# Altium PCB PCB_JD.PcbDoc
Units mil, origin at the board's own origin, x right, y up, seen from the top; angles counter-clockwise.
Board outline 1494.13 x 2047.24 mil, 2 copper layers (Top Layer, Bottom Layer); 26 components, 24 nets, 111 pads, 35 vias.
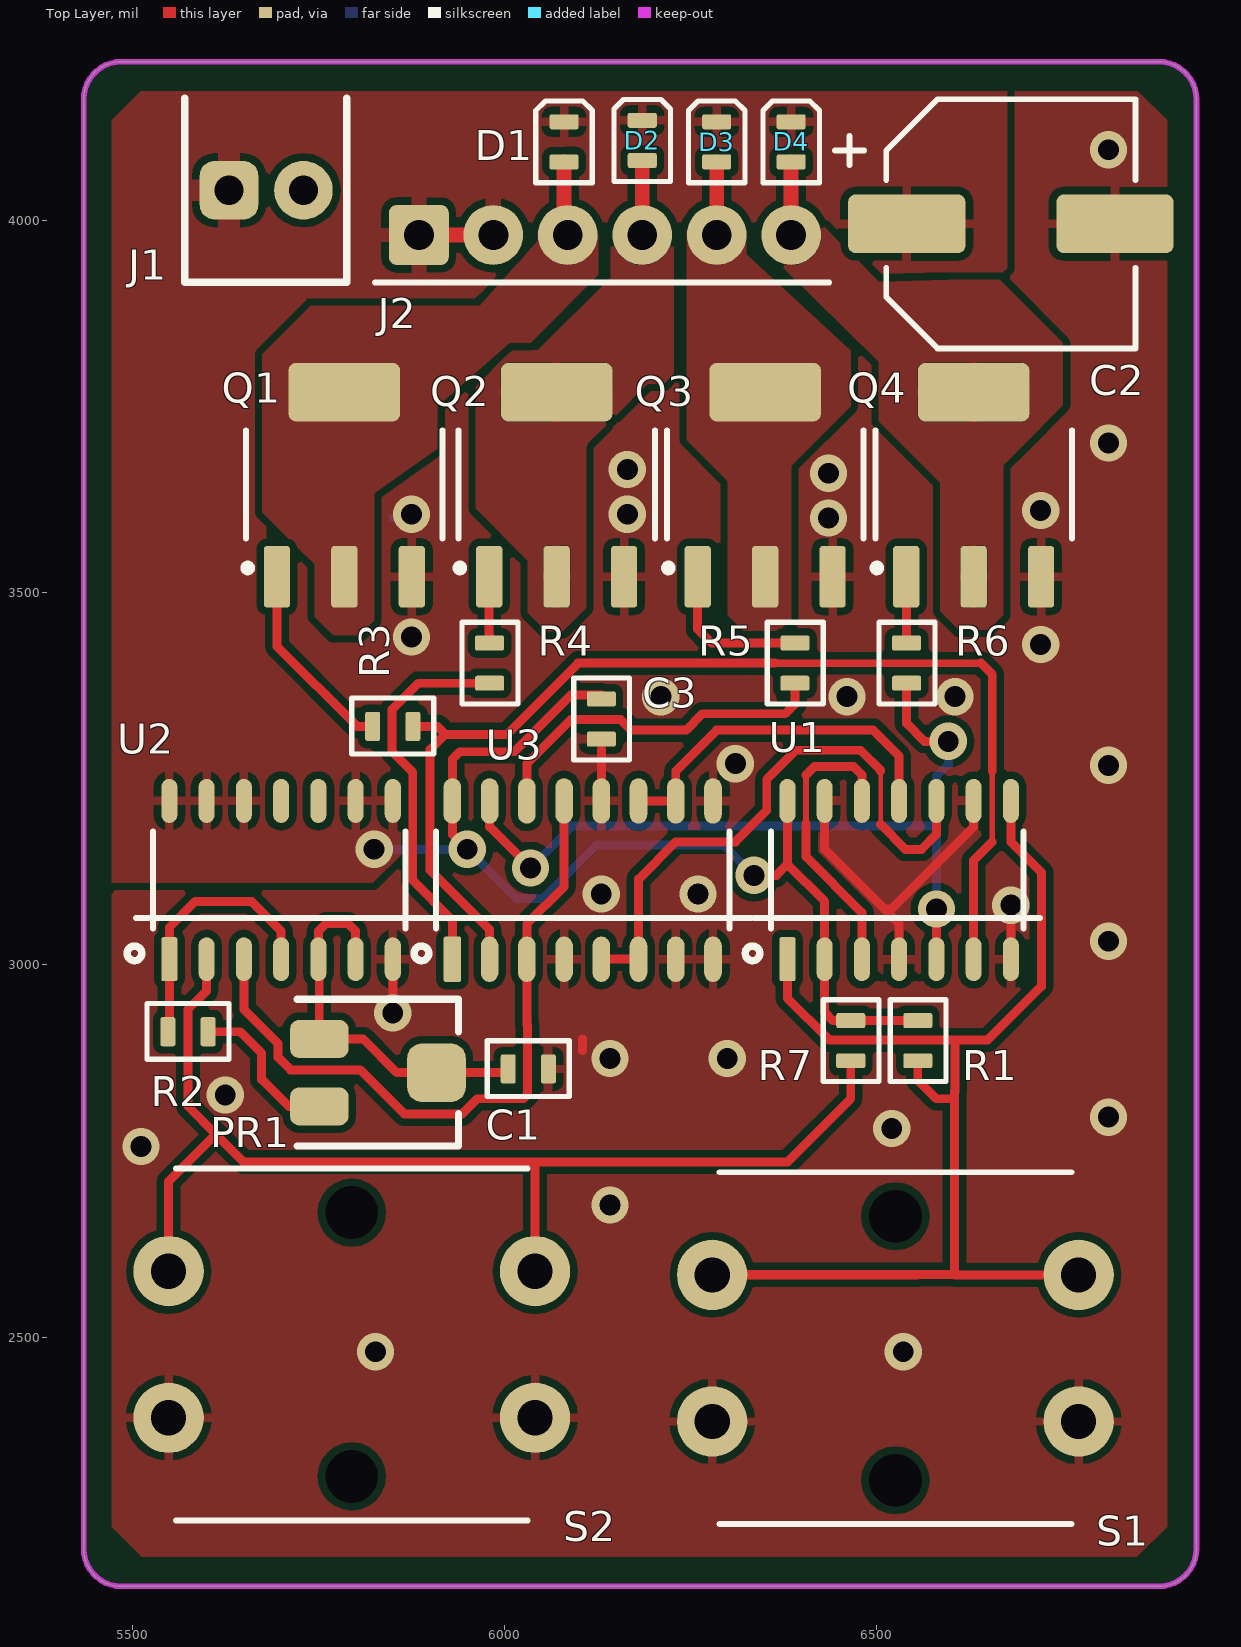
[diagram p0: Top Layer view]
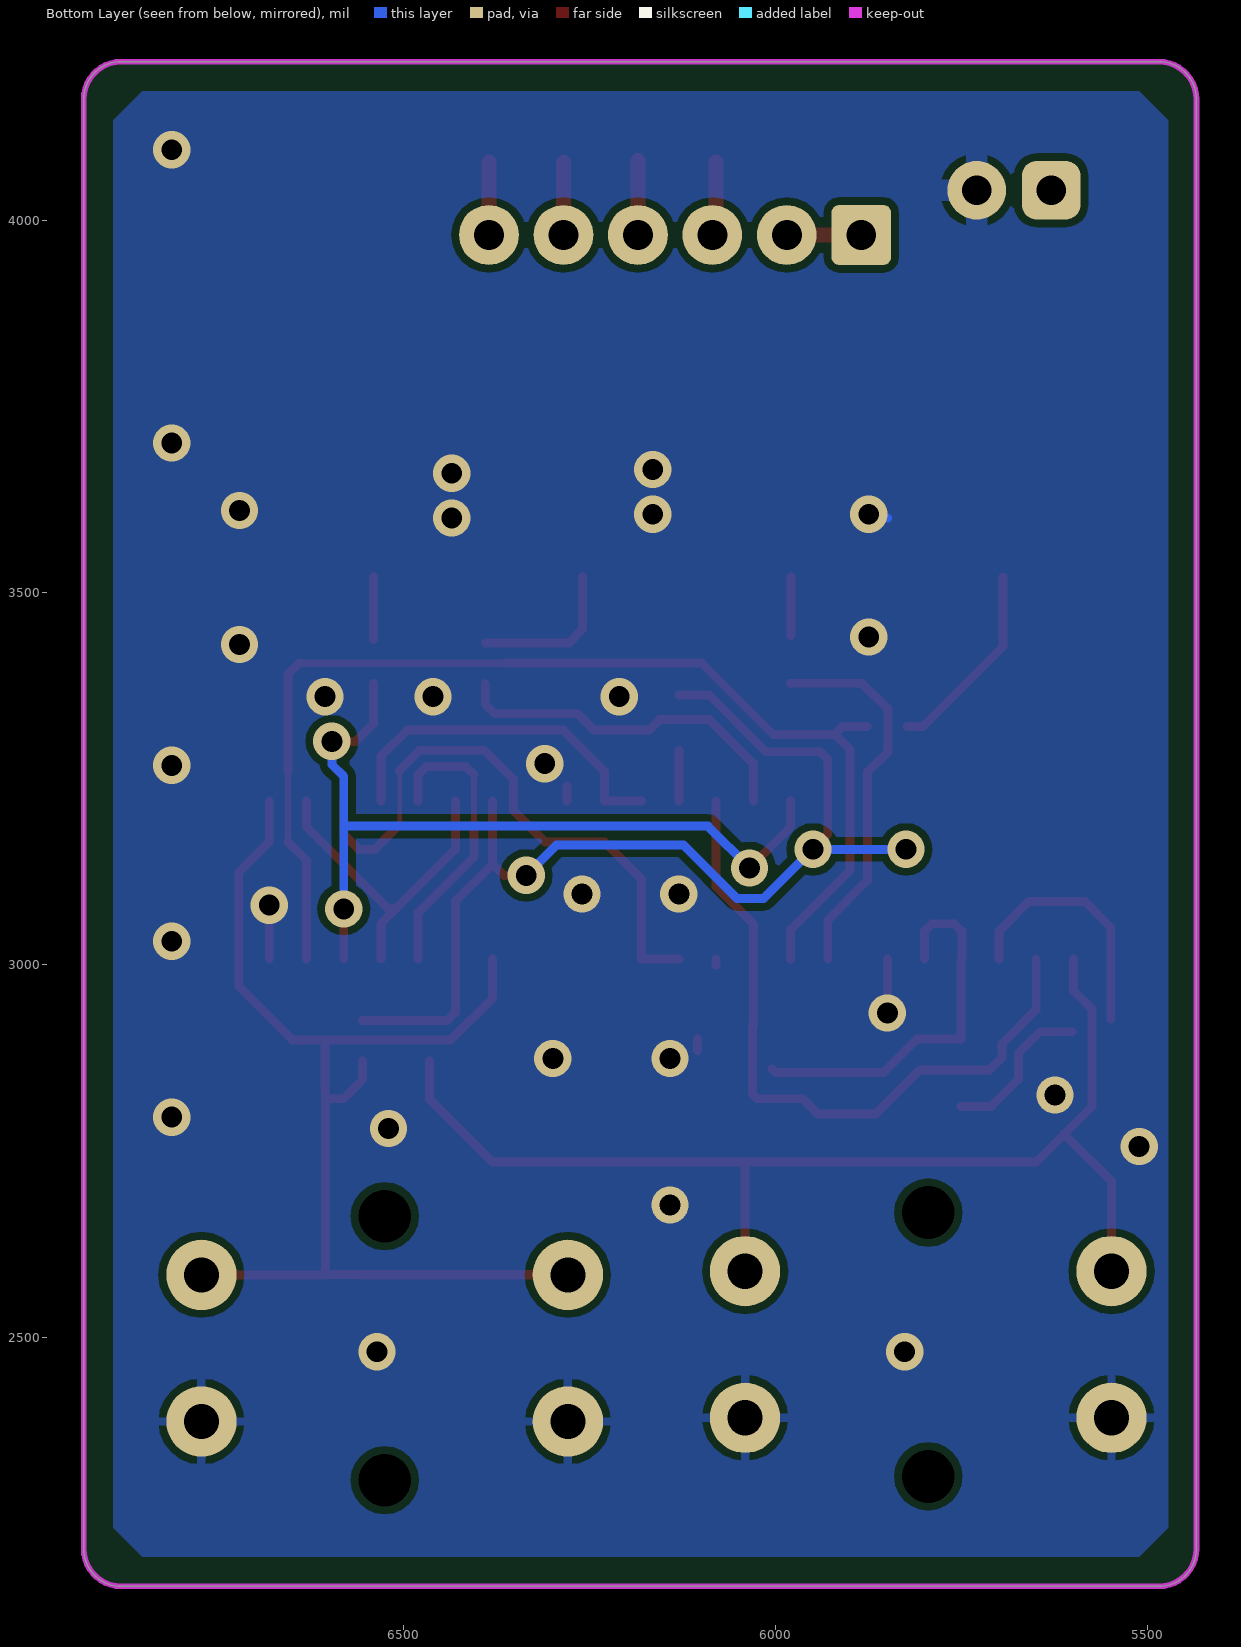
[diagram p1: Bottom Layer view, seen from below]

## Layer stack, top to bottom
Top Solder: solder mask 0.4, Solder Resist, Dk 3.5
Top Layer: signal copper 1.4
Dielectric 1: dielectric 12.6, FR-4, Dk 4.8
Bottom Layer: signal copper 1.4
Bottom Solder: solder mask 0.4, Solder Resist, Dk 3.5

## Board outline
5435,2215.35 ccw(c5485,2215.35) 5485,2165.35 6879.13,2165.35 ccw(c6879.13,2215.35) 6929.13,2215.35 6929.13,4162.6 ccw(c6879.13,4162.6) 6879.13,4212.6 5485,4212.6 ccw(c5485,4162.6) 5435,4162.6

## Design rules (kind name [scope] priority, off if disabled: settings)
Clearance [All] p1: gap=10 ignorepadtopadclearanceinfootprint=FALSE except(0: Arc-Hole Track-Hole SMDPad-Hole THPad-Hole Via-Hole Fill-Hole Poly-Hole Region-Hole Text-Hole)
PlaneConnect [All] p1: pad.planeconnectstyle=Relief pad.reliefexpansion=20 pad.reliefentries=4 pad.reliefconductorwidth=12 pad.reliefairgap=20 via.planeconnectstyle=Direct via.reliefexpansion=20 via.reliefentries=4 via.reliefconductorwidth=12 via.reliefairgap=10
PolygonConnect PolygonConnect_38 [All vs IsNamedPolygon('GND_L01_P029')] p1: thpad.connectstyle=Relief thpad.reliefconductorwidth=12 thpad.reliefentries=4 thpad.polygonreliefangle="90 Angle" thpad.airgapwidth=10 smdpad.connectstyle=Relief smdpad.reliefconductorwidth=12 smdpad.reliefentries=4 smdpad.polygonreliefangle="90 Angle" smdpad.airgapwidth=10 via.connectstyle=Direct via.reliefconductorwidth=10 via.reliefentries=4 via.polygonreliefangle="90 Angle" via.airgapwidth=10
PolygonConnect PolygonConnect_37 [All vs IsNamedPolygon('NETU1_4_L01_P025')] p2: thpad.connectstyle=Relief thpad.reliefconductorwidth=10 thpad.reliefentries=4 thpad.polygonreliefangle="90 Angle" thpad.airgapwidth=10 smdpad.connectstyle=Relief smdpad.reliefconductorwidth=12 smdpad.reliefentries=4 smdpad.polygonreliefangle="90 Angle" smdpad.airgapwidth=10 via.connectstyle=Relief via.reliefconductorwidth=10 via.reliefentries=4 via.polygonreliefangle="90 Angle" via.airgapwidth=10
PolygonConnect PolygonConnect_36 [All vs IsNamedPolygon('GND_L01_P027')] p3: thpad.connectstyle=Relief thpad.reliefconductorwidth=12 thpad.reliefentries=4 thpad.polygonreliefangle="90 Angle" thpad.airgapwidth=10 smdpad.connectstyle=Relief smdpad.reliefconductorwidth=12 smdpad.reliefentries=4 smdpad.polygonreliefangle="90 Angle" smdpad.airgapwidth=10 via.connectstyle=Direct via.reliefconductorwidth=10 via.reliefentries=4 via.polygonreliefangle="90 Angle" via.airgapwidth=10
PolygonConnect PolygonConnect_35 [All vs IsNamedPolygon('VCC_L01_P024')] p4: thpad.connectstyle=Relief thpad.reliefconductorwidth=20 thpad.reliefentries=4 thpad.polygonreliefangle="90 Angle" thpad.airgapwidth=10 smdpad.connectstyle=Relief smdpad.reliefconductorwidth=12 smdpad.reliefentries=4 smdpad.polygonreliefangle="90 Angle" smdpad.airgapwidth=10 via.connectstyle=Direct via.reliefconductorwidth=10 via.reliefentries=4 via.polygonreliefangle="90 Angle" via.airgapwidth=10
PolygonConnect PolygonConnect_34 [All vs IsNamedPolygon('GND_L01_P027')] p5: thpad.connectstyle=Relief thpad.reliefconductorwidth=12 thpad.reliefentries=4 thpad.polygonreliefangle="90 Angle" thpad.airgapwidth=10 smdpad.connectstyle=Relief smdpad.reliefconductorwidth=12 smdpad.reliefentries=4 smdpad.polygonreliefangle="90 Angle" smdpad.airgapwidth=10 via.connectstyle=Direct via.reliefconductorwidth=10 via.reliefentries=4 via.polygonreliefangle="90 Angle" via.airgapwidth=10
PolygonConnect PolygonConnect_33 [HasFootprint('ARK_DG308-2.54X2_JD') vs IsNamedPolygon('VCC_L01_P023')] p6: thpad.connectstyle=Relief thpad.reliefconductorwidth=30 thpad.reliefentries=4 thpad.polygonreliefangle="90 Angle" thpad.airgapwidth=10 smdpad.connectstyle=Relief smdpad.reliefconductorwidth=10 smdpad.reliefentries=4 smdpad.polygonreliefangle="90 Angle" smdpad.airgapwidth=10 via.connectstyle=Relief via.reliefconductorwidth=10 via.reliefentries=4 via.polygonreliefangle="90 Angle" via.airgapwidth=10
PolygonConnect PolygonConnect_32 [HasFootprint('SOT223_JD') vs IsNamedPolygon('GND_L02_P027')] p7: thpad.connectstyle=Relief thpad.reliefconductorwidth=10 thpad.reliefentries=4 thpad.polygonreliefangle="90 Angle" thpad.airgapwidth=10 smdpad.connectstyle=Relief smdpad.reliefconductorwidth=20 smdpad.reliefentries=4 smdpad.polygonreliefangle="90 Angle" smdpad.airgapwidth=10 via.connectstyle=Relief via.reliefconductorwidth=10 via.reliefentries=4 via.polygonreliefangle="90 Angle" via.airgapwidth=10
PolygonConnect PolygonConnect_31 [HasFootprint('ARK_DG308-2.54X2_JD') vs IsNamedPolygon('GND_L02_P027')] p8: thpad.connectstyle=Relief thpad.reliefconductorwidth=30 thpad.reliefentries=4 thpad.polygonreliefangle="90 Angle" thpad.airgapwidth=10 smdpad.connectstyle=Relief smdpad.reliefconductorwidth=10 smdpad.reliefentries=4 smdpad.polygonreliefangle="90 Angle" smdpad.airgapwidth=10 via.connectstyle=Relief via.reliefconductorwidth=10 via.reliefentries=4 via.polygonreliefangle="90 Angle" via.airgapwidth=10
PolygonConnect PolygonConnect_30 [All vs IsNamedPolygon('GND_L02_P027')] p9: thpad.connectstyle=Relief thpad.reliefconductorwidth=12 thpad.reliefentries=4 thpad.polygonreliefangle="90 Angle" thpad.airgapwidth=10 smdpad.connectstyle=Relief smdpad.reliefconductorwidth=12 smdpad.reliefentries=4 smdpad.polygonreliefangle="90 Angle" smdpad.airgapwidth=10 via.connectstyle=Direct via.reliefconductorwidth=10 via.reliefentries=4 via.polygonreliefangle="90 Angle" via.airgapwidth=10
PolygonConnect PolygonConnect_29 [All vs IsNamedPolygon('VCC_L01_P023')] p10: thpad.connectstyle=Relief thpad.reliefconductorwidth=20 thpad.reliefentries=4 thpad.polygonreliefangle="90 Angle" thpad.airgapwidth=10 smdpad.connectstyle=Relief smdpad.reliefconductorwidth=12 smdpad.reliefentries=4 smdpad.polygonreliefangle="90 Angle" smdpad.airgapwidth=10 via.connectstyle=Direct via.reliefconductorwidth=10 via.reliefentries=4 via.polygonreliefangle="90 Angle" via.airgapwidth=10
PolygonConnect PolygonConnect_28 [All vs IsNamedPolygon('GND_L02_P027')] p11: thpad.connectstyle=Relief thpad.reliefconductorwidth=12 thpad.reliefentries=4 thpad.polygonreliefangle="90 Angle" thpad.airgapwidth=10 smdpad.connectstyle=Relief smdpad.reliefconductorwidth=12 smdpad.reliefentries=4 smdpad.polygonreliefangle="90 Angle" smdpad.airgapwidth=10 via.connectstyle=Direct via.reliefconductorwidth=10 via.reliefentries=4 via.polygonreliefangle="90 Angle" via.airgapwidth=10
PolygonConnect PolygonConnect_27 [All vs IsNamedPolygon('GND_L01_P022')] p12: thpad.connectstyle=Relief thpad.reliefconductorwidth=10 thpad.reliefentries=4 thpad.polygonreliefangle="90 Angle" thpad.airgapwidth=10 smdpad.connectstyle=Relief smdpad.reliefconductorwidth=12 smdpad.reliefentries=4 smdpad.polygonreliefangle="90 Angle" smdpad.airgapwidth=10 via.connectstyle=Direct via.reliefconductorwidth=10 via.reliefentries=4 via.polygonreliefangle="90 Angle" via.airgapwidth=10
PolygonConnect PolygonConnect_26 [All vs IsNamedPolygon('GND_L01_P006') Or  IsNamedPolygon('GND_L01_P008')] p13: thpad.connectstyle=Relief thpad.reliefconductorwidth=10 thpad.reliefentries=4 thpad.polygonreliefangle="90 Angle" thpad.airgapwidth=10 smdpad.connectstyle=Relief smdpad.reliefconductorwidth=12 smdpad.reliefentries=4 smdpad.polygonreliefangle="90 Angle" smdpad.airgapwidth=10 via.connectstyle=Direct via.reliefconductorwidth=10 via.reliefentries=4 via.polygonreliefangle="90 Angle" via.airgapwidth=10
PolygonConnect PolygonConnect_25 [All vs IsNamedPolygon('NETD4_A_L01_P016') Or  IsNamedPolygon('NETD2_A_L01_P018')] p14: connectstyle=Direct reliefconductorwidth=10 reliefentries=4 polygonreliefangle="90 Angle" airgapwidth=10
PolygonConnect PolygonConnect_24 [All vs IsNamedPolygon('NETD1_A_L01_P004')] p15: connectstyle=Direct reliefconductorwidth=10 reliefentries=4 polygonreliefangle="90 Angle" airgapwidth=10
PolygonConnect PolygonConnect_23 [All vs IsNamedPolygon('NETD3_A_L01_P002')] p16: connectstyle=Direct reliefconductorwidth=10 reliefentries=4 polygonreliefangle="90 Angle" airgapwidth=10
PolygonConnect PolygonConnect_22 [All vs IsNamedPolygon('VCC_L01_P022')] p17: thpad.connectstyle=Relief thpad.reliefconductorwidth=20 thpad.reliefentries=4 thpad.polygonreliefangle="90 Angle" thpad.airgapwidth=10 smdpad.connectstyle=Relief smdpad.reliefconductorwidth=12 smdpad.reliefentries=4 smdpad.polygonreliefangle="90 Angle" smdpad.airgapwidth=10 via.connectstyle=Direct via.reliefconductorwidth=10 via.reliefentries=4 via.polygonreliefangle="90 Angle" via.airgapwidth=10
PolygonConnect PolygonConnect_21 [All vs IsNamedPolygon('NETD1_A_L01_P004') Or  IsNamedPolygon('NETD3_A_L01_P002')] p18: thpad.connectstyle=Relief thpad.reliefconductorwidth=70 thpad.reliefentries=4 thpad.polygonreliefangle="90 Angle" thpad.airgapwidth=10 smdpad.connectstyle=Relief smdpad.reliefconductorwidth=20 smdpad.reliefentries=4 smdpad.polygonreliefangle="90 Angle" smdpad.airgapwidth=10 via.connectstyle=Direct via.reliefconductorwidth=10 via.reliefentries=4 via.polygonreliefangle="90 Angle" via.airgapwidth=10
PolygonConnect PolygonConnect_20 [All vs IsNamedPolygon('NETD1_A_L01_P004') Or  IsNamedPolygon('NETD3_A_L01_P002')] p19: thpad.connectstyle=Relief thpad.reliefconductorwidth=80 thpad.reliefentries=4 thpad.polygonreliefangle="90 Angle" thpad.airgapwidth=10 smdpad.connectstyle=Relief smdpad.reliefconductorwidth=20 smdpad.reliefentries=4 smdpad.polygonreliefangle="90 Angle" smdpad.airgapwidth=10 via.connectstyle=Direct via.reliefconductorwidth=10 via.reliefentries=4 via.polygonreliefangle="90 Angle" via.airgapwidth=10
PolygonConnect PolygonConnect_19 [All vs IsNamedPolygon('NETD4_A_L02_P024')] p20: thpad.connectstyle=Relief thpad.reliefconductorwidth=80 thpad.reliefentries=4 thpad.polygonreliefangle="90 Angle" thpad.airgapwidth=10 smdpad.connectstyle=Relief smdpad.reliefconductorwidth=20 smdpad.reliefentries=4 smdpad.polygonreliefangle="90 Angle" smdpad.airgapwidth=10 via.connectstyle=Direct via.reliefconductorwidth=10 via.reliefentries=4 via.polygonreliefangle="90 Angle" via.airgapwidth=10
PolygonConnect PolygonConnect_18 [All vs IsNamedPolygon('NETD4_A_L02_P024')] p21: thpad.connectstyle=Relief thpad.reliefconductorwidth=80 thpad.reliefentries=4 thpad.polygonreliefangle="90 Angle" thpad.airgapwidth=10 smdpad.connectstyle=Relief smdpad.reliefconductorwidth=20 smdpad.reliefentries=4 smdpad.polygonreliefangle="90 Angle" smdpad.airgapwidth=10 via.connectstyle=Direct via.reliefconductorwidth=10 via.reliefentries=4 via.polygonreliefangle="90 Angle" via.airgapwidth=10
PolygonConnect PolygonConnect_17 [All vs IsNamedPolygon('NETD2_A_L02_P022')] p22: thpad.connectstyle=Relief thpad.reliefconductorwidth=80 thpad.reliefentries=4 thpad.polygonreliefangle="90 Angle" thpad.airgapwidth=10 smdpad.connectstyle=Relief smdpad.reliefconductorwidth=20 smdpad.reliefentries=4 smdpad.polygonreliefangle="90 Angle" smdpad.airgapwidth=10 via.connectstyle=Direct via.reliefconductorwidth=10 via.reliefentries=4 via.polygonreliefangle="90 Angle" via.airgapwidth=10
PolygonConnect PolygonConnect_16 [All vs IsNamedPolygon('NETD2_A_L02_P022')] p23: thpad.connectstyle=Relief thpad.reliefconductorwidth=80 thpad.reliefentries=4 thpad.polygonreliefangle="90 Angle" thpad.airgapwidth=10 smdpad.connectstyle=Relief smdpad.reliefconductorwidth=10 smdpad.reliefentries=4 smdpad.polygonreliefangle="90 Angle" smdpad.airgapwidth=10 via.connectstyle=Relief via.reliefconductorwidth=10 via.reliefentries=4 via.polygonreliefangle="90 Angle" via.airgapwidth=10
PolygonConnect PolygonConnect_15 [All vs IsNamedPolygon('NETD4_A_L02_P024')] p24: thpad.connectstyle=Relief thpad.reliefconductorwidth=80 thpad.reliefentries=4 thpad.polygonreliefangle="90 Angle" thpad.airgapwidth=10 smdpad.connectstyle=Relief smdpad.reliefconductorwidth=20 smdpad.reliefentries=4 smdpad.polygonreliefangle="90 Angle" smdpad.airgapwidth=10 via.connectstyle=Direct via.reliefconductorwidth=10 via.reliefentries=4 via.polygonreliefangle="90 Angle" via.airgapwidth=10
PolygonConnect PolygonConnect_14 [All vs IsNamedPolygon('GND_L01_P020')] p25: thpad.connectstyle=Relief thpad.reliefconductorwidth=20 thpad.reliefentries=4 thpad.polygonreliefangle="90 Angle" thpad.airgapwidth=10 smdpad.connectstyle=Relief smdpad.reliefconductorwidth=20 smdpad.reliefentries=4 smdpad.polygonreliefangle="90 Angle" smdpad.airgapwidth=10 via.connectstyle=Direct via.reliefconductorwidth=10 via.reliefentries=4 via.polygonreliefangle="90 Angle" via.airgapwidth=10
PolygonConnect PolygonConnect_13 [All vs IsNamedPolygon('NETD4_A_L01_P016')] p26: thpad.connectstyle=Relief thpad.reliefconductorwidth=80 thpad.reliefentries=4 thpad.polygonreliefangle="90 Angle" thpad.airgapwidth=10 smdpad.connectstyle=Relief smdpad.reliefconductorwidth=20 smdpad.reliefentries=4 smdpad.polygonreliefangle="90 Angle" smdpad.airgapwidth=10 via.connectstyle=Direct via.reliefconductorwidth=10 via.reliefentries=4 via.polygonreliefangle="90 Angle" via.airgapwidth=10
PolygonConnect PolygonConnect_12 [All vs IsNamedPolygon('VCC_L01_P006')] p27: thpad.connectstyle=Relief thpad.reliefconductorwidth=40 thpad.reliefentries=4 thpad.polygonreliefangle="90 Angle" thpad.airgapwidth=10 smdpad.connectstyle=Relief smdpad.reliefconductorwidth=12 smdpad.reliefentries=4 smdpad.polygonreliefangle="90 Angle" smdpad.airgapwidth=10 via.connectstyle=Direct via.reliefconductorwidth=10 via.reliefentries=4 via.polygonreliefangle="90 Angle" via.airgapwidth=10
PolygonConnect PolygonConnect_11 [All vs IsNamedPolygon('NETD4_A_L01_P016')] p28: thpad.connectstyle=Relief thpad.reliefconductorwidth=20 thpad.reliefentries=4 thpad.polygonreliefangle="90 Angle" thpad.airgapwidth=10 smdpad.connectstyle=Relief smdpad.reliefconductorwidth=20 smdpad.reliefentries=4 smdpad.polygonreliefangle="90 Angle" smdpad.airgapwidth=10 via.connectstyle=Direct via.reliefconductorwidth=10 via.reliefentries=4 via.polygonreliefangle="90 Angle" via.airgapwidth=10
PolygonConnect PolygonConnect_10 [All vs IsNamedPolygon('NETD2_A_L01_P018')] p29: thpad.connectstyle=Relief thpad.reliefconductorwidth=80 thpad.reliefentries=4 thpad.polygonreliefangle="90 Angle" thpad.airgapwidth=10 smdpad.connectstyle=Relief smdpad.reliefconductorwidth=20 smdpad.reliefentries=4 smdpad.polygonreliefangle="90 Angle" smdpad.airgapwidth=10 via.connectstyle=Direct via.reliefconductorwidth=10 via.reliefentries=4 via.polygonreliefangle="90 Angle" via.airgapwidth=10
PolygonConnect PolygonConnect_9 [All vs IsNamedPolygon('NETD2_A_L01_P018')] p30: thpad.connectstyle=Relief thpad.reliefconductorwidth=20 thpad.reliefentries=4 thpad.polygonreliefangle="90 Angle" thpad.airgapwidth=10 smdpad.connectstyle=Relief smdpad.reliefconductorwidth=20 smdpad.reliefentries=4 smdpad.polygonreliefangle="90 Angle" smdpad.airgapwidth=10 via.connectstyle=Direct via.reliefconductorwidth=10 via.reliefentries=4 via.polygonreliefangle="90 Angle" via.airgapwidth=10
PolygonConnect PolygonConnect_8 [All vs IsNamedPolygon('NONET_L02_P016')] p31: thpad.connectstyle=Relief thpad.reliefconductorwidth=12 thpad.reliefentries=4 thpad.polygonreliefangle="90 Angle" thpad.airgapwidth=10 smdpad.connectstyle=Relief smdpad.reliefconductorwidth=12 smdpad.reliefentries=4 smdpad.polygonreliefangle="90 Angle" smdpad.airgapwidth=10 via.connectstyle=Direct via.reliefconductorwidth=10 via.reliefentries=4 via.polygonreliefangle="90 Angle" via.airgapwidth=10
PolygonConnect PolygonConnect_7 [All vs IsNamedPolygon('VCC_L01_P006')] p32: thpad.connectstyle=Relief thpad.reliefconductorwidth=20 thpad.reliefentries=4 thpad.polygonreliefangle="90 Angle" thpad.airgapwidth=10 smdpad.connectstyle=Relief smdpad.reliefconductorwidth=10 smdpad.reliefentries=4 smdpad.polygonreliefangle="90 Angle" smdpad.airgapwidth=10 via.connectstyle=Direct via.reliefconductorwidth=10 via.reliefentries=4 via.polygonreliefangle="90 Angle" via.airgapwidth=10
PolygonConnect PolygonConnect_6 [All vs IsNamedPolygon('GND_L01_P004')] p33: thpad.connectstyle=Relief thpad.reliefconductorwidth=10 thpad.reliefentries=4 thpad.polygonreliefangle="90 Angle" thpad.airgapwidth=10 smdpad.connectstyle=Relief smdpad.reliefconductorwidth=20 smdpad.reliefentries=4 smdpad.polygonreliefangle="90 Angle" smdpad.airgapwidth=10 via.connectstyle=Direct via.reliefconductorwidth=10 via.reliefentries=4 via.polygonreliefangle="90 Angle" via.airgapwidth=10
PolygonConnect PolygonConnect_5 [All vs IsNamedPolygon('GND_L01_P002')] p34: thpad.connectstyle=Relief thpad.reliefconductorwidth=10 thpad.reliefentries=4 thpad.polygonreliefangle="90 Angle" thpad.airgapwidth=10 smdpad.connectstyle=Relief smdpad.reliefconductorwidth=20 smdpad.reliefentries=4 smdpad.polygonreliefangle="90 Angle" smdpad.airgapwidth=10 via.connectstyle=Direct via.reliefconductorwidth=10 via.reliefentries=4 via.polygonreliefangle="90 Angle" via.airgapwidth=10
PolygonConnect PolygonConnect_4 [All vs IsNamedPolygon('VCC_L01_P006')] p35: connectstyle=Relief reliefconductorwidth=20 reliefentries=4 polygonreliefangle="90 Angle" airgapwidth=10
PolygonConnect PolygonConnect_3 [All vs IsNamedPolygon('NETD4_A_L01_P016')] p36: connectstyle=Relief reliefconductorwidth=12 reliefentries=4 polygonreliefangle="90 Angle" airgapwidth=10
PolygonConnect PolygonConnect_2 [All vs IsNamedPolygon('GND_L01_P004')] p37: thpad.connectstyle=Relief thpad.reliefconductorwidth=10 thpad.reliefentries=4 thpad.polygonreliefangle="90 Angle" thpad.airgapwidth=10 smdpad.connectstyle=Relief smdpad.reliefconductorwidth=12 smdpad.reliefentries=4 smdpad.polygonreliefangle="90 Angle" smdpad.airgapwidth=10 via.connectstyle=Direct via.reliefconductorwidth=10 via.reliefentries=4 via.polygonreliefangle="90 Angle" via.airgapwidth=10
PolygonConnect PolygonConnect_1 [All vs IsNamedPolygon('GND_L01_P004') Or  IsNamedPolygon('GND_L01_P004')] p38: thpad.connectstyle=Relief thpad.reliefconductorwidth=12 thpad.reliefentries=4 thpad.polygonreliefangle="90 Angle" thpad.airgapwidth=10 smdpad.connectstyle=Relief smdpad.reliefconductorwidth=10 smdpad.reliefentries=4 smdpad.polygonreliefangle="90 Angle" smdpad.airgapwidth=10 via.connectstyle=Relief via.reliefconductorwidth=10 via.reliefentries=4 via.polygonreliefangle="90 Angle" via.airgapwidth=10
PolygonConnect [IsPolygon vs IsVia] p39 off: thpad.connectstyle=Direct thpad.reliefconductorwidth=10 thpad.reliefentries=4 thpad.polygonreliefangle="90 Angle" thpad.airgapwidth=10 smdpad.connectstyle=Relief smdpad.reliefconductorwidth=12 smdpad.reliefentries=4 smdpad.polygonreliefangle="90 Angle" smdpad.airgapwidth=10 via.connectstyle=Direct via.reliefconductorwidth=10 via.reliefentries=4 via.polygonreliefangle="90 Angle" via.airgapwidth=10
RoutingVias [All] p1: holewidth=28 width=50 viastyle="Through Hole" minholewidth=28 minwidth=50 maxholewidth=28 maxwidth=50
SolderMaskExpansion [All] p1: expansion=4
Width "Schematic Width Constraint_1" [InNet('NetR1_1')] p1: maxlimit=60 minlimit=10 preferedwidth=10 minimp=50.000000 maximp=50.000000 favimp=50.000000
Width "Schematic Width Constraint" [InNet('NetR7_1')] p2: maxlimit=50 minlimit=10 preferedwidth=10 minimp=50.000000 maximp=50.000000 favimp=50.000000
Width [All] p3: maxlimit=140 minlimit=6 preferedwidth=12 minimp=50.000000 maximp=50.000000 favimp=50.000000
29 further rules are at their usual default settings.

## Components (designator, comment, footprint, x,y, rotation, side; value= is the part's Value field where it differs from the comment)
C1 "Cap Semi" R0603_JD 6031.97,2860 r180 top value=470nF
C2 "ELECTROLYTIC_CAP_JD" POL_CAP_JD 6680,3995 r0 top value=470uF
C3 "Cap Semi" R0603_JD 6130,3330 r90 top value=100nF
D1 "1N4148" D0603_JD 6080,4105 r90 top
D2 "1N4148" D0603_JD 6185,4106.97 r90 top
D3 "1N4148" D0603_JD 6285,4105 r90 top
D4 "1N4148" D0603_JD 6385,4105 r90 top
J1 "ARK_2.54" ARK_DG308-2.54X2_JD 5630,4040 r90 top
J2 "GOLDPIN_HEADER" GOLDPINX6_JD 5885,3980 r90 top
PR1 "TRIMPOT" J_VISHAY_JD 5830,2855 r270 top value=1M
Q1 "IRLL014NTRPBF" SOT223_JD 5785,3645 r90 top
Q2 "IRLL014NTRPBF" SOT223_JD 6070,3645 r90 top
Q3 "IRLL014NTRPBF" SOT223_JD 6350,3645 r90 top
Q4 "IRLL014NTRPBF" SOT223_JD 6630,3645 r90 top
R1 "RES_JD" R0603_JD 6555,2898.03 r90 top value=1K
R2 "RES_JD" R0603_JD 5575,2910 r180 top value=1K
R3 "RES_JD" R0603_JD 5850,3320 r180 top value=100
R4 "RES_JD" R0603_JD 5980,3405 r90 top value=100
R5 "RES_JD" R0603_JD 6390,3405 r90 top value=100
R6 "RES_JD" R0603_JD 6540,3405 r90 top value=100
R7 "RES_JD" R0603_JD 6465,2898.03 r90 top value=1K
S1 "SWITCH_JD" SPST_JD 6525,2485 r0 top
S2 "SWITCH_JD" SPST_JD 5795,2490 r0 top
U1 "CD4070BM" SO14_JD 6530,3113.7 r90 top
U2 "CD4093BM" SO14_JD 5700,3113.7 r90 top
U3 "CD4027BM" SO16_JD 6105,3113.7 r90 top

## Footprints (in the part's own frame and the unit in brackets; to place one, negate y for a bottom-side part, rotate by r counter-clockwise, add the part's x,y. Pads: shape width x height; smd on the part's side, far side on the other; paste and mask are expansions set on the pad)
ARK_DG308-2.54X2_JD [mm]
  rrect50% 2x2 hole 1: 1(0,0)
  round 2 hole 1: 2(0,-2.54)
  silkscreen extent -3.14,-4.02 3.14,1.52, body extent -3.14,-4.02 3.14,1.52, height 8.5
D0603_JD [mm]
  rrect25% 0.51x0.99 smd: A(-0.685,0) K(0.685,0)
  silkscreen extent -1.4,-0.97 1.4,0.97, body extent -0.82,-0.45 0.82,0.45, height 0.75
GOLDPINX6_JD [mm]
  rrect25% 2.04x2.04 hole 1.02: 1(0,0)
  round 2.04 hole 1.02: 2(0,-2.54) 3(0,-5.08) 4(0,-7.62) 5(0,-10.16) 6(0,-12.7)
  silkscreen extent -1.63,-14 -1.63,1.5, body extent -1.25,-13.97 1.25,1.27, height 9.26
J_VISHAY_JD [mm]
  rrect50% 2x2 smd: 1(0,2)
  rrect50% 1.3x2 smd: 2(-1.15,-2) 3(1.15,-2)
  silkscreen extent -2.5,-2.75 2.5,2.75, body extent -2.47,-2.75 2.5,2.75, height 2.7
POL_CAP_JD [mm]
  rrect25% 4x2 smd: 1(-3.55,0) 2(3.55,0)
  silkscreen extent -6,-4.25 4.25,4.25, body extent -4.25,-4.25 4.25,4.25, height 10.8
R0603_JD [mm]
  rrect25% 0.51x0.99 smd: 1(-0.685,0) 2(0.685,0)
  silkscreen extent -1.4,-0.97 1.4,0.94, body extent -0.82,-0.45 0.82,0.45, height 0.75
SO14_JD [mm]
  rrect25% 1.5x0.55 smd: 1(-2.7,3.81)
  oval 1.5x0.55 smd: 2(-2.7,2.54) 3(-2.7,1.27) 4(-2.7,0) 5(-2.7,-1.27) 6(-2.7,-2.54) 7(-2.7,-3.81) 8(2.7,-3.81) 9(2.7,-2.54) 10(2.7,-1.27) 11(2.7,0) 12(2.7,1.27) 13(2.7,2.54) 14(2.7,3.81)
  silkscreen extent -2.75,-4.8 1.65,5.25, body extent -3,-4.34 2.99,4.35, height 1.61
SO16_JD [mm]
  rrect25% 1.55x0.6 smd: 1(-2.7,4.445)
  oval 1.55x0.6 smd: 2(-2.7,3.175) 3(-2.7,1.905) 4(-2.7,0.635) 5(-2.7,-0.635) 6(-2.7,-1.905) 7(-2.7,-3.175) 8(-2.7,-4.445) 9(2.7,-4.445) 10(2.7,-3.175) 11(2.7,-1.905) 12(2.7,-0.635) 13(2.7,0.635) 14(2.7,1.905) 15(2.7,3.175) 16(2.7,4.445)
  silkscreen extent -2.75,-5.75 1.65,5.75, body extent -3,-4.99 2.91,4.99, height 1.46
SOT223_JD [mm] "SOT223, 4-Leads, Body 6.5x3.5mm, Pitch 2.3mm, Lead Span 7mm, IPC High Density"
  rrect25% 2.1x0.9 smd: 1(-3.15,2.3) 2(-3.15,0) 3(-3.15,-2.3)
  rrect25% 2x3.8 smd: 2(3.15,0)
  silkscreen extent -2.97,-3.35 1.85,3.42, body extent -1.85,-3.35 1.85,3.35, height 1.8
SPST_JD [mm]
  round 2.4 hole 1.2: 1(-6.25,-2.5) 1(6.25,-2.5) 3(-6.25,2.5) 3(6.25,2.5)
  round 0 hole 1.8 unplated: 5(0,4.5) 6(0,-4.5)
  silkscreen extent -6,-6 6,6, body extent -6,-6 6,6, height 7.3

## Part data
C1 C3: "Capacitor (Semiconductor SIM Model)", LatestRevisionDate=29-May-2009, LatestRevisionNote="IPC-7351 Footprint Added.", PackageDescription="Chip Capacitor", PackageReference=C1206, Published=8-Jun-2000, Publisher="Altium Limited"
C2: Supplier Part Number 1=EEEFP1C471AP, LatestRevisionDate=17-Jul-2002, LatestRevisionNote="Re-released for DXP Platform.", PackageDescription="Polarized Capacitor; 2 Leads", PackageReference=POLAR0.8, Published=8-Jun-2000, Publisher="Altium Limited", Supplier 1=TME
D1 D2 D3 D4: library part 1N4148_JD, MAX CURRENT=150mA, MAX POWER=500mW, Supplier Part Number 1=1N4148-1206, helpURL=https://www.tme.eu/Document/8a0f4bd1d0e0495ebb1834ba060fbfa0/CD4148.pdf, Supplier 1=TME
J1: library part ARK2_2.54_JD, MAX CURRENT=6A, MAX Voltage=150, Supplier Part Number 1=DG308-2.54-02P, helpURL=https://www.tme.eu/Document/e399f683de63f8ff6d8fcb1baa663eaf/DG308-2.54.pdf, Supplier 1=TME
J2: library part GOLDPIN_JD, Supplier Part Number 1=77311-818-06LF, helpURL=https://www.tme.eu/Document/719e00d14e261a014e3a7e1c938a6b50/77311-818-XXLF.pdf, Supplier 1=TME
PR1: library part POT_TS53J_JD, RATED POWER=0.25W, Supplier Part Number 1=TS53YJ1M, helpURL=https://www.tme.eu/Document/214820d8bf228e416b0cbb84d9c6ed07/ts53yj.pdf, Supplier 1=TME
Q1 Q2 Q3 Q4: library part IRLL014NTRPBF_JD, Drain Current=2A, MAX POWER=2.1W, Supplier 1=TME, Supplier Part Number 1=IRLL014NTRPBF
R1 R2 R3 R4 R5 R6 R7: "Resistor", Supplier Part Number 1=0603SAF1000T5E, helpURL=https://www.tme.eu/Document/9e42ba54d36a9bd3dfa2901986ac022d/rezystor-smd.pdf, LatestRevisionDate=17-Jul-2002, LatestRevisionNote="Re-released for DXP Platform.", PackageDescription="Axial Device, Thru-Hole; 2 Leads; 0.4 in Pin Spacing", PackageReference=AXIAL-0.4, Published=8-Jun-2000, Publisher="Altium Limited", Supplier 1=TME
S1 S2: "Switch", Supplier Part Number 1=B3F-4055, LatestRevisionDate=17-Jul-2002, LatestRevisionNote="Re-released for DXP Platform.", PackageDescription="Switch; 2 Leads", PackageReference=SPST-2, Published=24-Mar-1999, Publisher="Altium Limited", Supplier 1=TME
U1: library part CD4070BM_XOR_JD, CASE=SO14, helpURL=http://www.ti.com/lit/ds/symlink/cd4077b.pdf, Supplier 1=TME, Supplier Part Number 1=CD4070BM
U2: library part CD4093BM_SCHMITT_JD, helpURL=https://www.ti.com/lit/ds/symlink/cd4093b.pdf, Supplier 1=TME, Supplier Part Number 1=CD4093BM
U3: library part CD4027BM_JKFF_JD, CASE=SOP16, helpURL=https://www.ti.com/lit/ds/symlink/cd4027b-mil.pdf, Supplier 1=TME, Supplier Part Number 1=CD4027BM

## Via types
v1: diameter 50, hole 28, Top Layer to Bottom Layer, tented both sides, 35 vias

## Nets (pads, with @x,y where several pads share a name; then routed paths per layer and width w, separated by ;. In a path a pad name is that pad's centre, name@x,y a point inside that pad or via, vN(x,y) a via of type N, cw(c..) or ccw(c..) an arc to the next point about the centre after c; other vN are vias at no path point)
GND: C1.1 C2.2 C3.1 J1.2 Q1.3 Q2.3 Q3.3 Q4.3 S1.1 S2.1 U1.7 U2.7 U3.4 U3.7 U3.8 U3.9 U3.12 | length 293.9
  Top Layer w12: v1(5850,2935) U2.7 ; U3.4@6080,2999.37 U3.4 ; 6105,2885 6105,2900 ; U3.12 6130,3288.03 ; v1@6130.98,2874.02 v1(6141.73,2874.02) ; U3.9 U3.9@6280,3240 ; U1.7 v1(6680,3080)
  Bottom Layer w12: 5850,3600 5870,3600 v1(5875,3605)
  other v1: 5826.77,2480.32 6535.43,2480.32 6141.73,2677.17 5511.81,2755.91 6520,2780 6811.02,2795.28 5625,2825 6299.21,2874.02 6811.02,3031.5 6130,3095 6260,3095 6811.02,3267.72 6310,3270 6210,3360 6460,3360 6605,3360 6720,3430 5875,3440 6435,3600 6165,3605 6720,3610 6435,3660 6165,3665 6811.02,3700.79 6811.02,4094.49
NetC1_2: C1.2 PR1.1 PR1.2 U2.5 U2.6 | length 515.7
  Top Layer w12: U2.6 5800,3045 5790,3055 5760,3055 5750,3045 U2.5 5751.26,3006.14 PR1.2 5810,2900.28 5855.28,2855 PR1.1 6000,2855 C1.2
NetD1_A: D1.A J2.3 Q1.2 | length 100.1
  Top Layer w20: D1.A 6080,3985 J2.3
NetD2_A: D2.A J2.4 Q2.2 | length 100
  Top Layer w20: J2.4 D2.A
NetD3_A: D3.A J2.5 Q3.2 | length 109.4
  Top Layer w20: J2.5@6276.97,3988.03 J2.5 D3.A
NetD4_A: D4.A J2.6 Q4.2 | length 110.7
  Top Layer w20: J2.6 D4.A
  Bottom Layer w20: J2.6 J2.6@6393.94,3988.94
NetPR1_3: PR1.3 R2.1 | length 211.3
  Top Layer w12: R2.1 5645,2910 5673.89,2881.11 5673.89,2846.11 5710.28,2809.72 PR1.3
NetQ1_1: Q1.1 R3.2 | length 266.6
  Top Layer w12: Q1.1 5694.45,3427.52 5801.97,3320 R3.2
NetQ2_1: Q2.1 R4.2 | length 79.2
  Top Layer w12: Q2.1 5979.45,3442.52 R4.2@5980,3441.97
NetQ3_1: Q3.1 R5.2 | length 208.7
  Top Layer w12: Q3.1 6259.45,3450.55 6278.03,3431.97 R5.2
NetQ4_1: Q4.1 R6.2 | length 84.2
  Top Layer w12: Q4.1 6540,3520.43 R6.2@6540,3436.97
NetR1_1: R1.1 S1.3 U1.1 U1.8 | length 1883.2
  Top Layer w12: U1.1 6380,2955 6436.04,2898.96 6605,2898.96 ; 6555,2583.43 6278.94,2583.43 6279.47,2583.96 6604.47,2583.96 ; R1.1 6555,2845 6580,2820 6604.47,2820 ; U1.8 6680,3165 6721,3124 6721,2971 6648.96,2898.96 6605,2898.96 ; S1.3@6771.06,2583.43 6605,2583.43 6604.47,2583.96 ; 6604.47,2583.96 6604.47,2820 ; 6604.47,2820 6604.47,2830.53 6605,2830 6605,2898.96
NetR2_2: R2.2 U2.1 U2.4 | length 341.7
  Top Layer w12: R2.2@5550,2926.97 U2.1 5550,3050 5585,3085 5660,3085 5700,3045 U2.4
NetR3_1: R3.1 U1.6 U3.2 | length 1565.2
  Top Layer w8: 6655,3165 6655,3260
  Top Layer w10: 6363.02,3405 6640,3405
  Top Layer w12: R3.1 5910,3320 5920.5,3309.5 ; U3.2 5980,3047.02 5900,3127.02 5900,3289 5920.5,3309.5 ; 6363.02,3405 6098.89,3405 6002.89,3309 5921,3309 5920.5,3309.5 ; U1.6 6630,3140 6655,3165 ; 6640,3405 6655,3390 6655,3260
NetR4_1: R4.1 U3.1 | length 514.4
  Top Layer w12: U3.1 5930,3060 5876.83,3113.17 5876.83,3258.17 5849.07,3285.93 5849.07,3342.79 5884.32,3378.03 R4.1
NetR5_1: R5.1 U3.14 | length 482.8
  Top Layer w12: U3.14 6030,3270 6089.07,3329.07 6155.93,3329.07 6170,3315 6243.89,3315 6265.89,3337 6377,3337 6390,3350 R5.1
NetR6_1: R6.1 U1.5 U3.15 | length 1094.1
  Top Layer w12: U3.15 5980,3185 v1(6034.96,3130.04) ; R6.1 6540,3324 6564,3300 v1(6596,3300) ; U1.5 v1(6580,3075)
  Bottom Layer w12: v1(6034.96,3130.04) 6090.92,3186 6574,3186 ; v1(6580,3075) 6580,3252.87 6596,3268.87 v1(6596,3300)
NetR7_1: R7.1 S2.3 U2.2 | length 1572.1
  Top Layer w12: S2.3@5548.94,2588.43 5548.94,2708.94 5612.5,2772.5 ; U2.2 5600,2965 5575,2940 5575,2810 5612.5,2772.5 ; S2.3@6041.06,2588.43 6041.06,2735 ; R7.1 6465,2820 6380,2735 6041.06,2735 ; 5612.5,2772.5 5650,2735 6041.06,2735
NetU1_3: U1.3 U1.12 | length 397.8
  Top Layer w8: 6405,3190 6405,3255
  Top Layer w12: 6405,3190 6405,3145 6480,3070 U1.3 ; 6405,3255 6416,3266 6469,3266 6480,3255 U1.12
NetU1_4: U1.4 U1.9 U1.13 | length 454.6
  Top Layer w12: U1.13 6430,3155 6510,3075 ; U1.4 6530,3055 6510,3075 ; U1.9 6630,3185 6520,3075 6510,3075
NetU1_10: U1.10 U3.5 U3.6 | length 804.6
  Top Layer w6: 6505,3188.36 6505,3260
  Top Layer w12: U3.5 U3.6 6180,3115 6230,3165 6310,3165 6352.23,3207.23 6352.23,3248.87 6391.36,3288 6478.11,3288 6505,3261.11 6505,3260 ; 6505,3188.36 6538.36,3155 6560,3155 6580,3175 U1.10
NetU1_11: U1.11 U3.10 U3.11 | length 487.3
  Top Layer w12: U3.11 U3.10 6230,3260 6285,3315 6495,3315 6530,3280 U1.11
NetU2_3: U2.3 U3.3 U3.13 | length 943.5
  Top Layer w12: U2.3 5650,2940 5695.89,2894.11 5695.89,2875.55 5712.76,2858.68 5806.31,2858.68 5865.37,2799.63 5943.21,2799.63 5963.58,2820 6025,2820 6031.04,2826.04 6031.04,2918.96 6030,2920 U3.3 6030,3055 6080,3105 U3.13
VCC: C2.1 C3.2 D1.K D2.K D3.K D4.K J1.1 J2.1 J2.2 R1.2 R7.2 U1.2 U1.14 U2.8 U2.9 U2.12 U2.13 U2.14 U3.16 | length 1534.5
  Top Layer w12: v1(5950,3155) 5930,3175 U3.16 5930,3276 5940,3286 6013.23,3286 6089.48,3362.25 C3.2@6130,3362.25 ; v1(6335,3120) 6365,3120 6380,3135 ; U1.14 6380,3135 ; R1.2 R7.2 6441.11,2925 6430,2936.11 U1.2 6430,3085 6380,3135
  Top Layer w20: J2.1 J2.2
  Bottom Layer w12: v1(5825,3155) v1(5950,3155) 6015.96,3089.04 6051.94,3089.04 6123.91,3161 6294,3161 v1(6335,3120)
pads on no net: S1.5 S1.6 S2.5 S2.6 U2.10 U2.11

## Polygon pours and split planes (outlines as drawn)
GND on Top Layer "GND_L01_P029" (solid, pour order 29): 5511.81,4173.23 5472.44,4133.86 5472.44,2245.24 5512.95,2204.72 6849.39,2204.72 6889.76,2245.1 6889.76,4133.86 6850.39,4173.23
VCC on Top Layer "VCC_L01_P023" (solid, pour order 23): 5960,3895 6028.88,3953.97 6190,3953.97 6455.74,3953.97 6482.5,3907.5 6645,3910 6675,3935 6675,4173.23 5511.81,4173.23 5472.44,4133.86 5472.44,3110 5551.42,3110 5823.38,3110 5885,3171.62 5885,3255 5855,3285 5825,3285 5680,3430 5680,3838.64 5720,3875 5735,3895 5915,3895
NetD2_A on Top Layer "NETD2_A_L01_P016" (solid, pour order 16): 6142.79,3982.79 6142.79,3922.79 6045,3825 6010,3825 5961.23,3776.23 5961.23,3612.79 6031.23,3542.79 6031.23,3472.79 6056.23,3447.79 6091.23,3447.79 6111.23,3467.79 6111.23,3677.79 6136.23,3702.79 6227.21,3793.77 6227.21,3935 6227.21,3982.79 6185,4025
GND on Top Layer "GND_L01_P006" (solid, pour order 6): 6067.56,3422.44 6120,3474.89 6120,3693.68 6196.41,3770.09 6211.18,3770.09 6295,3770.09 6295,3686.27 6295,3337.44 6067.56,3337.44
NetU1_4 on Top Layer "NETU1_4_L01_P025" (solid, pour order 25): 6398.36,3228 6446.68,3276.32 6580,3249 6632,3247 6650,3216 6638,3099 6592,3053 6572,2985.96 6488,2985.96 6405,3145
NetD1_A on Top Layer "NETD1_A_L01_P004" (solid, pour order 4): 5770,3442.5 5805,3442.5 5825,3462.5 5825,3633.24 5910,3693.24 5910,3750.2 6006.91,3835 6035,3835 6126.25,3926.25 6126.25,3980 6087.5,4020 6045,3985 6045,3980 6045,3972.4 5966.96,3885 5740,3885 5675,3820 5675,3607.5 5745,3537.5 5745,3467.5
NetD3_A on Top Layer "NETD3_A_L01_P002" (solid, pour order 2): 6300,3469.55 6325,3444.55 6365,3444.55 6385,3464.55 6385,3670 6465,3750 6465,3824.55 6325,3953.78 6325,3985 6285,4020 6245,3985 6245,3835 6245,3704.55 6300,3649.55
NetD4_A on Top Layer "NETD4_A_L01_P008" (solid, pour order 8): 6610,3450 6585,3475 6585,3647.5 6502.5,3730 6502.5,3810 6347.5,3962.5 6360,4010 6410,4010 6485.89,3934.11 6502.5,3917.5 6595,3920 6665,3920 6750,3835 6750,3751 6694,3695 6670,3671 6670,3470 6650,3450
GND on Bottom Layer "GND_L02_P027" (solid, pour order 27): 5511.81,4173.23 5472.44,4133.86 5472.44,2244.09 5511.81,2204.72 6850.39,2204.72 6889.76,2244.09 6889.76,4133.86 6850.39,4173.23

## Keep-outs
Keep-Out Layer:
  lines w7.87: 5435,2215.35 ccw(c5485,2215.35) 5485,2165.35 6764.37,2165.35 6879.13,2165.35 ccw(c6879.13,2215.35) 6929.13,2215.35 6929.13,4162.6 ccw(c6879.13,4162.6) 6879.13,4212.6 6764.37,4212.6 5485,4212.6 ccw(c5485,4162.6) 5435,4162.6 5435,2215.35